# EAGLE board OpenBook_Board (EAGLE 9.7.0)
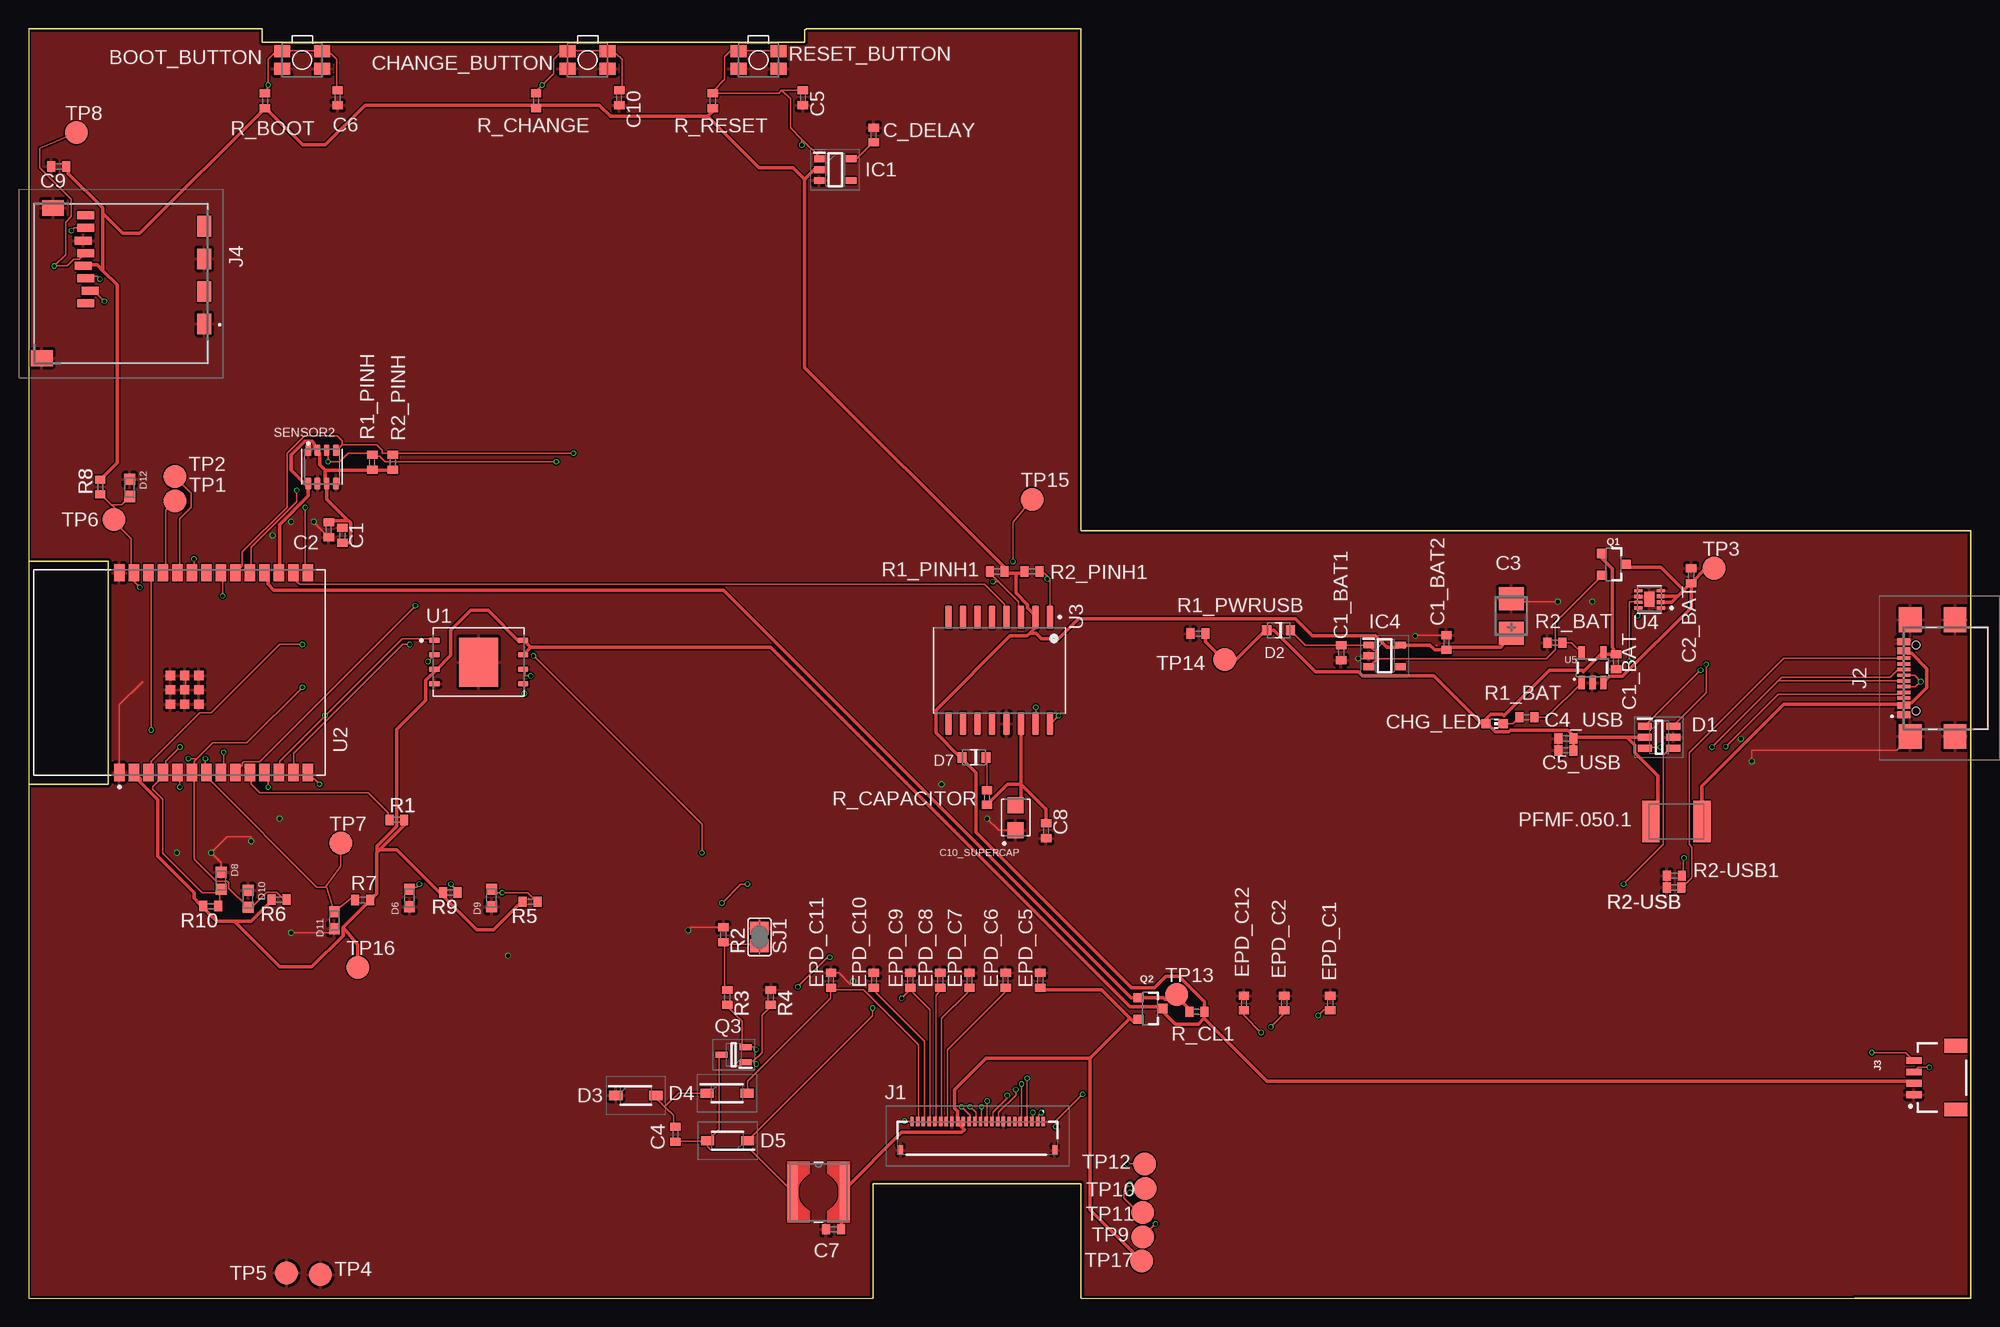
[diagram p0: board, top side]
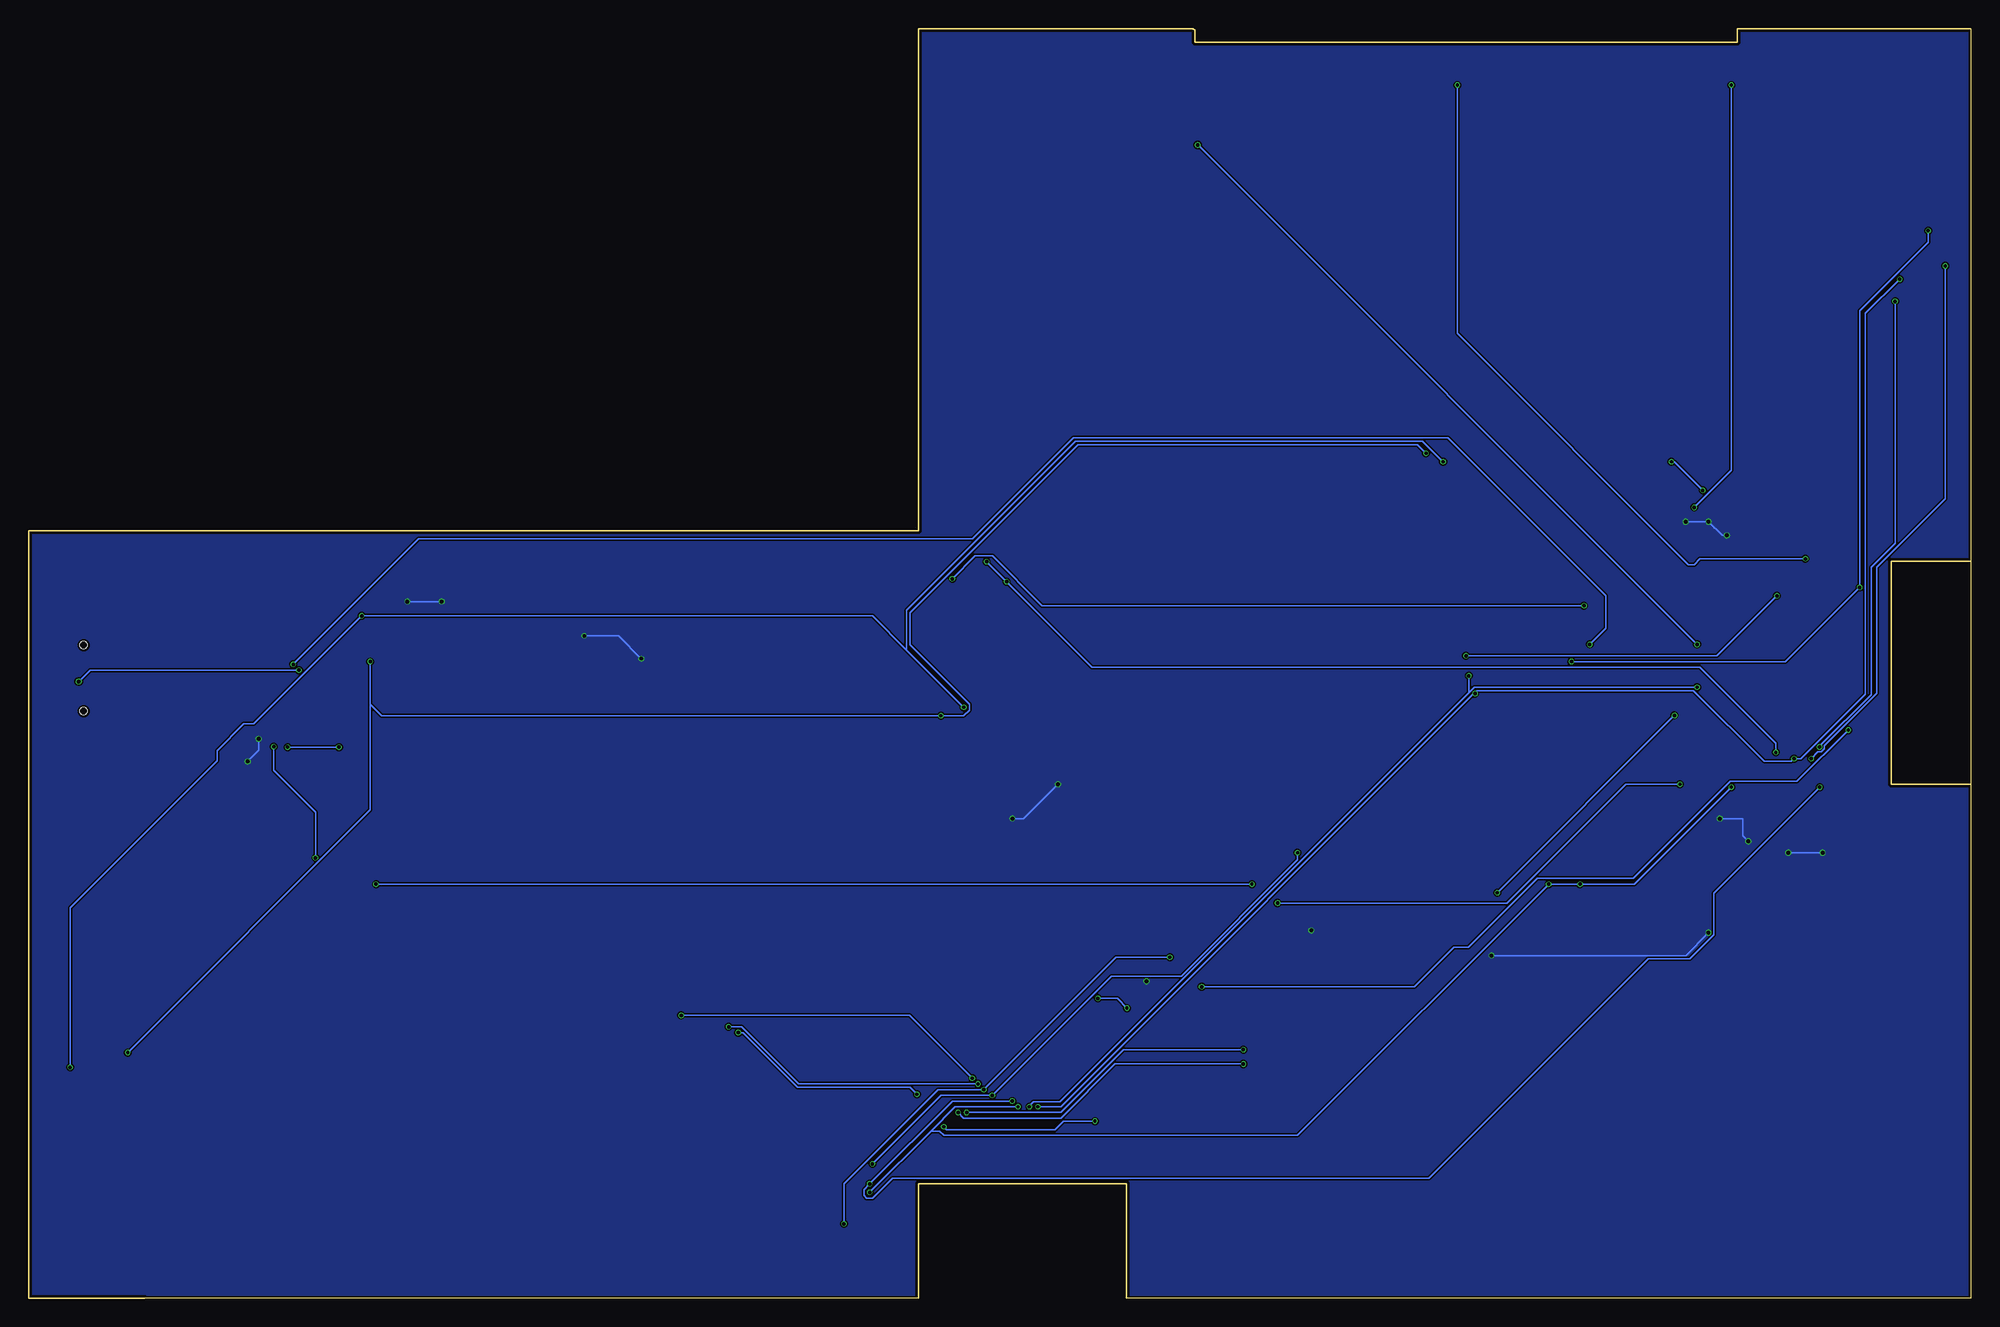
[diagram p1: board, bottom side, seen from below]

Size 170.19 x 111.2 mm. Coordinates in mm from the lower left corner, seen from the top.
Outline: 0,64.54 0,111.2 20.48,111.2 20.48,110 68,110 68,111.03 68.17,111.2 92.2,111.2 92.2,67.2 170.19,67.2 170.19,0 160,0 92.2,0 92.2,10 74,10 74,0 0,0 0,45
Outline: 0,64.54 0,45
Outline: 0,64.54 7,64.54 7,45 0,45
Copper layers (1*16): Top 0.035mm / dielectric 1.6mm / Bottom 0.035mm
Design rules "jlcpcb-2layers.dru": minimum track width 0.15mm, minimum drill 0.3mm, track to track 5mil, track to pad 5mil, pad to pad 5mil, via to via 5mil, smd to smd 5mil, copper to edge 0.2mm, drill to drill 6mil, minimum pad ring 10mil, minimum via ring 3mil, stop-mask expansion 4mil, vias tented up to drill 0mil, thermal gap 10mil
Net classes: 1 pwr: width 0.3 mm

## Footprints (pad centres in the part's own frame; a part is rotated, then mirrored left to right if it is on the bottom)
MYBUTTON = smd 1.4 x 1.05: 1 1.75,0.75; 2 -1.75,0.75; 3 -1.75,-0.75; 4 1.75,-0.75
EAGLE-LTSPICE_C0402 = smd 0.7 x 0.9: 1 -0.65,0; 2 0.65,0
RCL_CT3528 = smd 2 x 2.2: + -1.5,0; - 1.5,0
CAPCP3225X100N = smd 1.4 x 1.4: 1 -1.1,0; 2 1.1,0
ADAFRUIT_CHIP-LED0603 = smd 0.8 x 0.8: A 0,-0.75; C 0,0.75
SOT95P280X145-6N = smd 1.2 x 0.6: 1 -1.25,0.95; 2 -1.25,0; 3 -1.25,-0.95; 4 1.25,-0.95; 5 1.25,0; 6 1.25,0.95
ESP32_WROVER_AVX---SD0805S020S1R0_AVX_SD0805S020S1R0_0 = smd 0.8 x 0.9: 1 -1.05,0; 2 1.05,0
SOD3716X135N = smd 1.15 x 0.8: 1 -1.75,0; 2 1.75,0
DIOC1608X36N = smd 0.97 x 0.94: 1 -0.75,0; 2 0.75,0
SOT95P280X125-5N = smd 0.9 x 0.6: 1 -1.4,0.95; 2 -1.4,0; 3 -1.4,-0.95; 4 1.4,-0.95; 5 1.4,0.95
SOT95P280X120-5N = smd 0.9 x 0.6: 1 -1.4,0.95; 2 -1.4,0; 3 -1.4,-0.95; 4 1.4,-0.95; 5 1.4,0.95
FH34SRJ24S05SH99 = smd 0.3 x 0.8: 1 5.75,1.45; 2 5.25,1.45; 3 4.75,1.45; 4 4.25,1.45; 5 3.75,1.45; 6 3.25,1.45; 7 2.75,1.45; 8 2.25,1.45; 9 1.75,1.45; 10 1.25,1.45; 11 0.75,1.45; 12 0.25,1.45; 13 -0.25,1.45; 14 -0.75,1.45; 15 -1.25,1.45; 16 -1.75,1.45; 17 -2.25,1.45; 18 -2.75,1.45; 19 -3.25,1.45; 20 -3.75,1.45; 21 -4.25,1.45; 22 -4.75,1.45; 23 -5.25,1.45; 24 -5.75,1.45 | smd 0.4 x 0.8: MP1 6.75,-1.05; MP2 -6.75,-1.05
SAMACSYS_PARTS_USB4110GFA = smd 0.3 x 1.15: A1 -3.35,3.678; A4 -2.55,3.678; A5 -1.25,3.678; A6 -0.25,3.678; A7 0.25,3.678; A8 1.25,3.678; A9 2.55,3.678; A12 3.35,3.678; B1 3.05,3.678; B4 2.25,3.678; B5 1.75,3.678; B6 0.75,3.678; B7 -0.75,3.678; B8 -1.75,3.678; B9 -2.25,3.678; B12 -3.05,3.678 | smd 2.18 x 2: MP1 -5.11,-0.827; MP2 5.11,-0.827; MP3 -5.11,3.103; MP4 5.11,3.103 | hole 0.65: -2.89,2.603; 2.89,2.603
JST04_1MM_RA = smd 0.6 x 1.35: 1 -1.5,0; 2 -0.5,0; 3 0.5,0; 4 1.5,0 | smd 1.2 x 2: NC1 2.8,-3.675; NC2 -2.8,-3.675
112ATAARR03ATTEND = smd 1.8 x 1.2: G1 10.6,10.4; G2 4.9,10.4; S1 7.75,10.4; S2 2.05,10.4 | smd 1.4 x 1.9: G3 13.6,-3.85; G4 0.45,-2.85 | smd 0.7 x 1.5: P1 8.8,0; P2 7.7,0.4; P3 6.6,0; P4 5.5,-0.2; P5 4.4,0; P6 3.3,-0.2; P7 2.2,0; P8 1.1,0
IND_4828-WE-TPC_WRE = smd 0.889 x 4.826: 1 -2.286,0; 2 2.286,0
ESP32C6_VARISTOR_CT/CN1812 = smd 1.5 x 3.6: 1 -2.25,0; 2 2.25,0
ESP32_WROVER_SPARKFUN-DISCRETESEMI_SOT23-3 = smd 0.8 x 0.9: 1 -0.95,-1; 2 0.95,-1; 3 0,1.1
SOT65P210X110-3N = smd 1.05 x 0.5: 1 -1.05,0.65; 2 -1.05,-0.65; 3 1.05,0
ESP32_WROVER_EAGLE-LTSPICE_R0402 = smd 0.7 x 0.9: 1 -0.65,0; 2 0.65,0
ESP32_WROVER_BME680_PSON80P300X300X100-8N = smd 1.016 x 0.5: 1 1.458,1.2; 2 1.458,0.4; 3 1.458,-0.4; 4 1.458,-1.2; 5 -1.458,-1.22; 6 -1.458,-0.4; 7 -1.458,0.4; 8 -1.458,1.2
SJ = smd 1.168 x 1.6: 1 -0.762,0; 2 0.762,0
TP20R = smd 2 x 2: TP 0,0
SON127P600X800X80-9N = smd 0.94 x 0.44: 1 -3.895,1.905; 2 -3.895,0.635; 3 -3.895,-0.635; 4 -3.895,-1.905; 5 3.895,-1.905; 6 3.895,-0.635; 7 3.895,0.635; 8 3.895,1.905 | smd 3.4 x 4.3: 9 0,0
XCVR_ESP32-C6-WROOM-1-N8 = smd 1.5 x 0.9: 1 -8.75,5.26; 2 -8.75,3.99; 3 -8.75,2.72; 4 -8.75,1.45; 5 -8.75,0.18; 6 -8.75,-1.09; 7 -8.75,-2.36; 8 -8.75,-3.63; 9 -8.75,-4.9; 10 -8.75,-6.17; 11 -8.75,-7.44; 12 -8.75,-8.71; 13 -8.75,-9.98; 14 -8.75,-11.25; 15 8.75,-11.25; 16 8.75,-9.98; 17 8.75,-8.71; 18 8.75,-7.44; 19 8.75,-6.17; 20 8.75,-4.9; 21 8.75,-3.63; 22 8.75,-2.36; 23 8.75,-1.09; 24 8.75,0.18; 25 8.75,1.45; 26 8.75,2.72; 27 8.75,3.99; 28 8.75,5.26 | smd 0.8 x 0.8: 29_1 -2.755,0.79; 29_2 -1.505,0.79; 29_3 -0.255,0.79; 29_4 -2.755,-0.46; 29_5 -1.505,-0.46; 29_6 -0.255,-0.46; 29_7 -2.755,-1.71; 29_8 -1.505,-1.71; 29_9 -0.255,-1.71
SOIC127P1032X265-16N = smd 2.05 x 0.59: 1 -4.655,4.445; 2 -4.655,3.175; 3 -4.655,1.905; 4 -4.655,0.635; 5 -4.655,-0.635; 6 -4.655,-1.905; 7 -4.655,-3.175; 8 -4.655,-4.445; 9 4.655,-4.445; 10 4.655,-3.175; 11 4.655,-1.905; 12 4.655,-0.635; 13 4.655,0.635; 14 4.655,1.905; 15 4.655,3.175; 16 4.655,4.445
SON50P200X200X80-9N = smd 0.76 x 0.27: 1 -0.985,0.75; 4 -0.985,-0.75; 5 0.985,-0.75; 6 0.985,-0.25; 7 0.985,0.25; 8 0.985,0.75 | smd 0.76 x 0.35: 2 -0.985,0.25; 3 -0.985,-0.25 | smd 0.9 x 1.3: 9 0,0
ESP32_WROVER_SPARKFUN-IC-POWER_SOT23-5 = smd 0.55 x 1.2: 1 -0.95,-1.3; 2 0,-1.3; 3 0.95,-1.3; 4 0.95,1.3; 5 -0.95,1.3

## Placement (x,y rotation side)
BOOT_BUTTON  BUTTON_CUSYOMV1MYBUTTON  [MYBUTTON]  23.99,108.45 180 top
C1  100nF  [EAGLE-LTSPICE_C0402]  27.5,66.8 90 top
C1_BAT  4.7uF  [EAGLE-LTSPICE_C0402]  139.09,55.72 270 top
C1_BAT1  4.7uF  [EAGLE-LTSPICE_C0402]  115.01,56.53 270 top
C1_BAT2  4.7uF  [EAGLE-LTSPICE_C0402]  124.23,57.42 90 top
C2  100nF  [EAGLE-LTSPICE_C0402]  26.31,67.29 270 top
C2_BAT  4.7uF  [EAGLE-LTSPICE_C0402]  145.67,63.28 90 top
C3  100uF  [RCL_CT3528]  129.91,59.74 90 top
C4  4.7uF/25V  [EAGLE-LTSPICE_C0402]  56.68,14.33 270 top
C4_USB  100nF  [EAGLE-LTSPICE_C0402]  134.7,49.01 180 top
C5  1uF  [EAGLE-LTSPICE_C0402]  67.85,105.13 270 top
C5_USB  4.7uF  [EAGLE-LTSPICE_C0402]  134.69,47.97 180 top
C6  100nF  [EAGLE-LTSPICE_C0402]  27.09,105.13 270 top
C7  10uF  [EAGLE-LTSPICE_C0402]  70.53,6.03 180 top
C8  100nF  [EAGLE-LTSPICE_C0402]  89.16,40.92 270 top
C9  100nF  [EAGLE-LTSPICE_C0402]  2.65,99.12 180 top
C10  100nF  [EAGLE-LTSPICE_C0402]  51.76,105.13 270 top
C10_SUPERCAP  CPH3225A  [CAPCP3225X100N]  86.49,42.08 90 top
C_DELAY  100nF  [EAGLE-LTSPICE_C0402]  74.05,101.87 90 top
CHANGE_BUTTON  BUTTON_CUSYOMV1MYBUTTON  [MYBUTTON]  48.99,108.45 180 top
CHG_LED  [ADAFRUIT_CHIP-LED0603]  128.45,50.3 270 top
D1  USBLC6-2SC6Y  [SOT95P280X145-6N]  142.86,49.12 0 top
D2  ESP32_WROVER_AVX---SD0805S020S1R0_AVX_SD0805S020S1R0_0_0AVX_SD0805S020S1R0_0_0  [ESP32_WROVER_AVX---SD0805S020S1R0_AVX_SD0805S020S1R0_0]  109.53,58.5 180 top
D3  MBR0530SOD3716X135  [SOD3716X135N]  53.21,17.74 0 top
D4  MBR0530SOD3716X135  [SOD3716X135N]  61.21,17.93 0 top
D5  MBR0530SOD3716X135  [SOD3716X135N]  61.24,13.78 180 top
D6  PGB1010603MRDIOC  [DIOC1608X36N]  33.38,35.04 90 top
D7  ESP32_WROVER_AVX---SD0805S020S1R0_AVX_SD0805S020S1R0_0_0AVX_SD0805S020S1R0_0_0  [ESP32_WROVER_AVX---SD0805S020S1R0_AVX_SD0805S020S1R0_0]  82.84,47.36 180 top
D8  PGB1010603MRDIOC  [DIOC1608X36N]  16.87,36.56 270 top
D9  PGB1010603MRDIOC  [DIOC1608X36N]  40.57,35.04 90 top
D10  PGB1010603MRDIOC  [DIOC1608X36N]  19.24,34.96 270 top
D11  PGB1010603MRDIOC  [DIOC1608X36N]  26.8,33.09 90 top
D12  PGB1010603MRDIOC  [DIOC1608X36N]  8.86,70.96 270 top
EPD_C1  1uF/50V  [EAGLE-LTSPICE_C0402]  114.05,25.84 90 top
EPD_C2  1uF/50V  [EAGLE-LTSPICE_C0402]  110.02,25.84 90 top
EPD_C5  0.1uF/50V  [EAGLE-LTSPICE_C0402]  88.64,27.84 90 top
EPD_C6  1uF/50V  [EAGLE-LTSPICE_C0402]  85.61,27.84 90 top
EPD_C7  1uF/50V  [EAGLE-LTSPICE_C0402]  82.45,27.84 90 top
EPD_C8  1uF/50V  [EAGLE-LTSPICE_C0402]  79.88,27.84 90 top
EPD_C9  1uF/50V  [EAGLE-LTSPICE_C0402]  77.26,27.84 90 top
EPD_C10  1uF/50V  [EAGLE-LTSPICE_C0402]  74.07,27.84 90 top
EPD_C11  1uF/50V  [EAGLE-LTSPICE_C0402]  70.31,27.84 90 top
EPD_C12  1uF/50V  [EAGLE-LTSPICE_C0402]  106.5,25.84 90 top
IC1  BD5229G-TR  [SOT95P280X125-5N]  70.68,98.84 0 top
IC4  XC6220A331MR-G  [SOT95P280X120-5N]  118.82,56.25 0 top
J1  FH34SRJ-24S-0.5SH_99_  [FH34SRJ24S05SH99]  83.16,14.01 0 top
J2  SAMACSYS_PARTS_USB4110-GF-A  [SAMACSYS_PARTS_USB4110GFA]  167.97,54.3 90 top
J3  QWIIC_RIGHT_ANGLE  [JST04_1MM_RA]  165.19,19.3 90 top
J4  112A-TAAR-R03_ATTEND  [112ATAARR03ATTEND]  5,95.93 270 top
L1  68uH  [IND_4828-WE-TPC_WRE]  69.22,9.27 0 top
PFMF.050.1  ESP32C6_VARISTORCN1812  [ESP32C6_VARISTOR_CT/CN1812]  144.38,41.74 180 top
Q1  20V/4.2A/52mΩ/1.4W  [ESP32_WROVER_SPARKFUN-DISCRETESEMI_SOT23-3]  138.85,64.26 270 top
Q2  20V/4.2A/52mΩ/1.4W  [ESP32_WROVER_SPARKFUN-DISCRETESEMI_SOT23-3]  98.26,25.36 270 top
Q3  SI1308EDL-T1-GE3  [SOT65P210X110-3N]  61.79,21.31 180 top
R1  10K  [ESP32_WROVER_EAGLE-LTSPICE_R0402]  32.27,41.88 0 top
R1_BAT  200  [ESP32_WROVER_EAGLE-LTSPICE_R0402]  131.27,50.86 180 top
R1_PINH  10K  [ESP32_WROVER_EAGLE-LTSPICE_R0402]  30.12,73.2 270 top
R1_PINH1  10K  [ESP32_WROVER_EAGLE-LTSPICE_R0402]  84.88,63.64 0 top
R1_PWRUSB  100K  [ESP32_WROVER_EAGLE-LTSPICE_R0402]  102.47,58.2 0 top
R2  2.2  [ESP32_WROVER_EAGLE-LTSPICE_R0402]  60.88,31.81 270 top
R2-USB  5k1  [ESP32_WROVER_EAGLE-LTSPICE_R0402]  144.18,35.96 180 top
R2-USB1  5k1  [ESP32_WROVER_EAGLE-LTSPICE_R0402]  144.19,36.99 0 top
R2_BAT  2K  [ESP32_WROVER_EAGLE-LTSPICE_R0402]  133.73,57.4 0 top
R2_PINH  10K  [ESP32_WROVER_EAGLE-LTSPICE_R0402]  31.93,73.2 270 top
R2_PINH1  10K  [ESP32_WROVER_EAGLE-LTSPICE_R0402]  87.92,63.65 180 top
R3  0.47  [ESP32_WROVER_EAGLE-LTSPICE_R0402]  61.23,26.33 270 top
R4  10K  [ESP32_WROVER_EAGLE-LTSPICE_R0402]  65.04,26.33 270 top
R5  10K  [ESP32_WROVER_EAGLE-LTSPICE_R0402]  43.96,34.71 180 top
R6  10K  [ESP32_WROVER_EAGLE-LTSPICE_R0402]  21.96,34.9 180 top
R7  10K  [ESP32_WROVER_EAGLE-LTSPICE_R0402]  29.29,34.86 0 top
R8  10K  [ESP32_WROVER_EAGLE-LTSPICE_R0402]  6.28,71.04 90 top
R9  10K  [ESP32_WROVER_EAGLE-LTSPICE_R0402]  36.96,35.52 180 top
R10  10K  [ESP32_WROVER_EAGLE-LTSPICE_R0402]  15.96,34.33 180 top
R_BOOT  10K  [ESP32_WROVER_EAGLE-LTSPICE_R0402]  20.72,104.87 90 top
R_CAPACITOR  15  [ESP32_WROVER_EAGLE-LTSPICE_R0402]  83.97,43.84 270 top
R_CHANGE  10K  [ESP32_WROVER_EAGLE-LTSPICE_R0402]  44.48,104.87 90 top
R_CL1  10K  [ESP32_WROVER_EAGLE-LTSPICE_R0402]  102.37,25.07 0 top
R_RESET  10K  [ESP32_WROVER_EAGLE-LTSPICE_R0402]  59.96,104.87 90 top
RESET_BUTTON  BUTTON_CUSYOMV1MYBUTTON  [MYBUTTON]  63.96,108.45 180 top
SENSOR2  BME688  [ESP32_WROVER_BME680_PSON80P300X300X100-8N]  25.72,72.8 90 top
SJ1  [SJ]  64.04,31.62 270 top
TP1  TPTP20R  [TP20R]  12.84,69.83 0 top
TP2  TPTP20R  [TP20R]  12.81,71.96 0 top
TP3  TPTP20R  [TP20R]  147.67,63.92 0 top
TP4  TPTP20R  [TP20R]  25.59,2.04 0 top
TP5  TPTP20R  [TP20R]  22.61,2.19 0 top
TP6  TPTP20R  [TP20R]  7.48,68.19 0 top
TP7  TPTP20R  [TP20R]  27.35,39.84 0 top
TP8  TPTP20R  [TP20R]  4.2,102.09 0 top
TP9  TPTP20R  [TP20R]  97.64,5.36 0 top
TP10  TPTP20R  [TP20R]  97.84,9.61 0 top
TP11  TPTP20R  [TP20R]  97.62,7.48 0 top
TP12  TPTP20R  [TP20R]  97.79,11.74 0 top
TP13  TPTP20R  [TP20R]  100.58,26.58 0 top
TP14  TPTP20R  [TP20R]  104.8,55.92 0 top
TP15  TPTP20R  [TP20R]  87.92,69.96 0 top
TP16  TPTP20R  [TP20R]  28.84,28.96 0 top
TP17  TPTP20R  [TP20R]  97.52,3.23 0 top
U1  W25Q512JVEIQ  [SON127P600X800X80-9N]  39.44,55.7 0 top
U2  ESP32-C6-WROOM-1-N8  [XCVR_ESP32-C6-WROOM-1-N8]  13.22,54.78 90 top
U3  DS3231SN#  [SOIC127P1032X265-16N]  85.06,54.97 270 top
U4  MAX17048G+T10  [SON50P200X200X80-9N]  142.02,61.2 180 top
U5  MCP73831  [ESP32_WROVER_SPARKFUN-IC-POWER_SOT23-5]  137.03,55.21 0 top

## Library data of the parts
BOOT_BUTTON C1 C1_BAT C1_BAT1 C1_BAT2 C2 C2_BAT C4 C4_USB C5 C5_USB C6-C10 C_DELAY CHANGE_BUTTON CHG_LED D2-D12 EPD_C1 EPD_C2 EPD_C5-EPD_C12 PFMF.050.1 Q1 Q2 R1 R1_BAT R1_PINH R1_PINH1 R1_PWRUSB R2 R2-USB R2-USB1 R2_BAT R2_PINH R2_PINH1 R3-R10 R_BOOT R_CAPACITOR R_CHANGE R_CL1 R_RESET RESET_BUTTON SJ1 TP1-TP17 = DeskAssistant v19 v1
C3 = DeskAssistant v19 v1; SPICEPREFIX: C
C10_SUPERCAP = DeskAssistant v19 v1; AVAILABILITY: Not in stock; CHECK_PRICES: https://www.snapeda.com/parts/CPH3225A/Seiko+Instruments/view-part/?ref=eda; DESCRIPTION: 11 mF (EDLC) Supercapacitor 3.3 V 1210 (3225 Metric) - -; MF: Seiko Instruments; MP: CPH3225A; PACKAGE: 1210 Seiko; PRICE: None; PURCHASE-URL: https://www.snapeda.com/api/url_track_click_mouser/?unipart_id=562593&manufacturer=Seiko Instruments&part_name=CPH3225A&search_term=None; SNAPEDA_LINK: https://www.snapeda.com/parts/CPH3225A/Seiko+Instruments/view-part/?ref=snap
D1 = DeskAssistant v19 v1; AVAILABILITY: In Stock; CHECK_PRICES: https://www.snapeda.com/parts/USBLC6-2SC6Y/STMicroelectronics/view-part/?ref=eda; DESCRIPTION: 17V Clamp 5A (8/20µs) Ipp Tvs Diode Surface Mount SOT-23-6; MF: STMicroelectronics; MP: USBLC6-2SC6Y; PACKAGE: SOT-23-6 STMicroelectronics; PRICE: None; SNAPEDA_LINK: https://www.snapeda.com/parts/USBLC6-2SC6Y/STMicroelectronics/view-part/?ref=snap
IC1 = DeskAssistant v19 v1; DESCRIPTION: Voltage Detector with Adjustable Delay Time: CMOS processes are utilized to develop high precision, low current consumption CMOS reset ICs that allow arbitrary setting of the delay time. The extensive lineup includes both Nch Open Drain and CMOS output types in a wide range of detection voltages (from 2.3V to 6.0V, in 0.1V steps), enabling selection of the ideal solution based on customer requirements. In addition, the entire series is of course both lead-free and RoHS-compliant.; HEIGHT: 1.25mm; MANUFACTURER_NAME: ROHM Semiconductor; MANUFACTURER_PART_NUMBER: BD5229G-TR; MOUSER_PART_NUMBER: 755-BD5229G-TR; MOUSER_PRICE-STOCK: https://www.mouser.co.uk/ProductDetail/ROHM-Semiconductor/BD5229G-TR?qs=4kLU8WoGk0vvnhrrYwdszw%3D%3D
IC4 = DeskAssistant v19 v1; DESCRIPTION: LDO Voltage Regulators; HEIGHT: 1.2mm; MANUFACTURER_NAME: Torex; MANUFACTURER_PART_NUMBER: XC6220A331MR-G; MOUSER_PART_NUMBER: 865-XC6220A331MR-G; MOUSER_PRICE-STOCK: https://www.mouser.co.uk/ProductDetail/Torex-Semiconductor/XC6220A331MR-G?qs=AsjdqWjXhJ8ZSWznL1J0gg%3D%3D
J1 = DeskAssistant v19 v1; DESCRIPTION: 24 Position FFC, FPC Connector Contacts, Top and Bottom 0.020" (0.50mm) Surface Mount, Right Angle; HEIGHT: 1.1mm; MANUFACTURER_NAME: Hirose; MANUFACTURER_PART_NUMBER: FH34SRJ-24S-0.5SH(99); MOUSER_PART_NUMBER: 798-FH34SRJ24S05SH99; MOUSER_PRICE-STOCK: https://www.mouser.co.uk/ProductDetail/Hirose-Connector/FH34SRJ-24S-0.5SH99?qs=vcbW%252B4%252BSTIpKBl5ap9J8Fw%3D%3D
J2 = DeskAssistant v19 v1; DESCRIPTION: CONN USB 2.0 TYPE-C R/A SMT; HEIGHT: 3.26mm; MANUFACTURER_NAME: GCT (GLOBAL CONNECTOR TECHNOLOGY); MANUFACTURER_PART_NUMBER: USB4110-GF-A; MOUSER_PART_NUMBER: 640-USB4110-GF-A; MOUSER_PRICE-STOCK: https://www.mouser.co.uk/ProductDetail/GCT/USB4110-GF-A?qs=KUoIvG%2F9IlYiZvIXQjyJeA%3D%3D
J3 = DeskAssistant v19 v1; PROD_ID: CONN-13694
J4 = DeskAssistant v19 v1; DESCRIPTION: Micro SD Card Socket, Push-Push Type, Top Mount, SMT, H=1.83mm, 10u; HEIGHT: 1.9mm; MANUFACTURER_NAME: ATTEND; MANUFACTURER_PART_NUMBER: 112A-TAAR-R03 ATTEND
L1 = DeskAssistant v19 v1; COPYRIGHT: Copyright (C) 2024 Ultra Librarian. All rights reserved.; MANUFACTURER_PART_NUMBER: 744043680; MFR_NAME: Wurth Electronics
Q3 = DeskAssistant v19 v1; AVAILABILITY: In Stock; CHECK_PRICES: https://www.snapeda.com/parts/SI1308EDL-T1-GE3/Vishay+Siliconix/view-part/?ref=eda; DESCRIPTION: Si1308EDL-T1-GE3 N-channel MOSFET Transistor, 1.5 A, 30 V, 3-Pin SC-70 | Siliconix / Vishay SI1308EDL-T1-GE3; MF: Vishay Siliconix; MP: SI1308EDL-T1-GE3; PACKAGE: SOT-323 Vishay Semiconductor; PRICE: None; PURCHASE-URL: https://www.snapeda.com/api/url_track_click_mouser/?unipart_id=274603&manufacturer=Vishay Siliconix&part_name=SI1308EDL-T1-GE3&search_term=None; SNAPEDA_LINK: https://www.snapeda.com/parts/SI1308EDL-T1-GE3/Vishay+Siliconix/view-part/?ref=snap
SENSOR2 = DeskAssistant v19 v1; AVAILABILITY: Unavailable; DESCRIPTION: Integrated Environmental Unit; MF: Bosch Sensortec; MP: BME680; PACKAGE: LGA-8 Bosch Tools; PRICE: None
U1 = DeskAssistant v19 v1; AVAILABILITY: In Stock; CHECK_PRICES: https://www.snapeda.com/parts/W25Q512JVEIQ/Winbond+Electronics/view-part/?ref=eda; DESCRIPTION: FLASH - NOR Memory IC 512Mb (64M x 8) SPI - Quad I/O 133 MHz 8-WSON (8x6); MF: Winbond Electronics; MP: W25Q512JVEIQ; PACKAGE: Package; PRICE: None; SNAPEDA_LINK: https://www.snapeda.com/parts/W25Q512JVEIQ/Winbond+Electronics/view-part/?ref=snap
U2 = DeskAssistant v19 v1; AVAILABILITY: In Stock; CHECK_PRICES: https://www.snapeda.com/parts/ESP32-C6-WROOM-1-N8/Espressif+Systems/view-part/?ref=eda; DESCRIPTION: Multiprotocol Modules ESP32-C6 module, Wi-Fi 6 in 2.4 GHz band, Bluetooth 5, Zigbee 3.0 and Thread. ESP34-WROOM Compatible - ENGINEERING SAMPLE; MF: Espressif Systems; MP: ESP32-C6-WROOM-1-N8; PACKAGE: None; PRICE: None; SNAPEDA_LINK: https://www.snapeda.com/parts/ESP32-C6-WROOM-1-N8/Espressif+Systems/view-part/?ref=snap
U3 = DeskAssistant v19 v1; AVAILABILITY: In Stock; CHECK_PRICES: https://www.snapeda.com/parts/DS3231SN%23/Analog+Devices/view-part/?ref=eda; DESCRIPTION: Extremely Accurate I²C-Integrated RTC/TCXO/Crystal; MF: Analog Devices; MP: DS3231SN#; PACKAGE: SOIC-16 Maxim; PRICE: None; PURCHASE-URL: https://www.snapeda.com/api/url_track_click_mouser/?unipart_id=99048&manufacturer=Analog Devices&part_name=DS3231SN#&search_term=None; SNAPEDA_LINK: https://www.snapeda.com/parts/DS3231SN%23/Analog+Devices/view-part/?ref=snap
U4 = DeskAssistant v19 v1; AVAILABILITY: In Stock; CHECK_PRICES: https://www.snapeda.com/parts/MAX17048G+T10/Analog+Devices/view-part/?ref=eda; DESCRIPTION: 3µA 1-Cell/2-Cell Fuel Gauge with ModelGauge; MF: Analog Devices; MP: MAX17048G+T10; PACKAGE: TDFN-8 Maxim; PRICE: None; PURCHASE-URL: https://www.snapeda.com/api/url_track_click_mouser/?unipart_id=329239&manufacturer=Analog Devices&part_name=MAX17048G+T10&search_term=None; SNAPEDA_LINK: https://www.snapeda.com/parts/MAX17048G+T10/Analog+Devices/view-part/?ref=snap
U5 = DeskAssistant v19 v1; PROD_ID: IC-09995

## Nets
3V3 [pwr]: C1_BAT2.1 C3.+ C9.1 D7.2 IC1.2 IC4.5 J3.2 J4.P4 Q2.3 R1.2 R1_PINH1.2 R2_PINH1.2 R5.2 R6.2 R7.2 R8.2 R9.2 R10.2 R_BOOT.1 R_CHANGE.1 R_CL1.2 R_RESET.1 TP16.TP U1.3 U1.7 U1.8 U2.2 U3.2
32KHZ: R2_PINH1.1 U2.9 U3.1
DN: D1.1 J2.A7 J2.B7
DP: D1.3 J2.A6 J2.B6
EPD_3V3 [pwr]: C7.1 EPD_C5.1 J1.15 J1.16 L1.2 Q2.2 TP17.TP
EPD_3V3_C [pwr]: Q2.1 R_CL1.1 TP13.TP U2.18
EPD_BUSY: J1.9 TP9.TP U2.26
EPD_CS: D6.2 J1.12 R9.1 TP10.TP U2.11
EPD_DC: J1.11 TP11.TP U2.5
EPD_RST: J1.10 TP12.TP U2.21
FLASH_CS: D9.2 R5.1 U1.1 U2.12
GDR: J1.2 Q3.1 R4.2
GND: BOOT_BUTTON.1 BOOT_BUTTON.2 C1.2 C1_BAT1.2 C1_BAT2.2 C1_BAT.2 C2.2 C2_BAT.2 C3.- C4_USB.2 C5.2 C5_USB.2 C6.2 C7.2 C8.2 C9.2 C10.2 C10_SUPERCAP.1 C_DELAY.2 CHANGE_BUTTON.1 CHANGE_BUTTON.2 D1.5 D3.1 D6.1 D8.1 D9.1 D10.1 D11.1 D12.1 EPD_C1.2 EPD_C2.2 EPD_C5.2 EPD_C6.2 EPD_C7.2 EPD_C8.2 EPD_C9.2 EPD_C10.2 EPD_C11.2 EPD_C12.2 IC1.3 IC4.2 J1.8 J1.17 J1.MP1 J1.MP2 J2.A1 J2.A12 J2.B1 J2.B12 J2.MP1 J2.MP2 J2.MP3 J2.MP4 J3.1 J4.G1 J4.G2 J4.G3 J4.G4 J4.P6 R1_PWRUSB.1 R2-USB1.1 R2-USB.2 R2.1 R2_BAT.1 R4.1 RESET_BUTTON.1 RESET_BUTTON.2 SENSOR2.1 SENSOR2.5 SENSOR2.7 SJ1.1 TP4.TP TP5.TP U1.4 U1.9 U2.1 U2.28 U2.29_1 U2.29_2 U2.29_3 U2.29_4 U2.29_5 U2.29_6 U2.29_7 U2.29_8 U2.29_9 U3.13 U4.1 U4.4 U4.6 U4.9 U5.2
GPIO8: R1.1 U2.10
I2C_PW [pwr]: C1.1 C2.1 R1_PINH.2 R2_PINH.2 SENSOR2.2 SENSOR2.6 SENSOR2.8 U2.17
INT_RTC: R1_PINH1.1 TP15.TP U2.8 U3.3
IO/BOOT: BOOT_BUTTON.3 BOOT_BUTTON.4 C6.1 R_BOOT.2 U2.15
IO/CHANGE: C10.1 CHANGE_BUTTON.3 CHANGE_BUTTON.4 R_CHANGE.2 U2.23
MISO: D12.2 J4.P7 R8.1 TP6.TP U1.2 U2.27
MOSI: D11.2 J1.14 J4.P3 R7.1 TP7.TP U1.5 U2.7
N$2: J2.A5 R2-USB1.2
N$5: D7.1 R_CAPACITOR.1
N$10: J2.B5 R2-USB.1
N$20: C1_BAT1.1 D2.1 IC4.1 IC4.3 Q1.2
N$41: C4.1 D3.2 D4.1
N$43: R1_BAT.1 U5.1
N$44: CHG_LED.C R1_BAT.2
N$45: R2_BAT.2 U5.5
N$48: EPD_C12.1 J1.24
N$50: EPD_C10.1 J1.22
N$52: EPD_C8.1 J1.20
N$53: EPD_C7.1 J1.19
N$54: EPD_C6.1 J1.18
N$65: EPD_C2.1 J1.5
N$66: EPD_C1.1 J1.4
N$77: C_DELAY.1 IC1.5
PREVGH: D5.1 EPD_C9.1 J1.21
PREVGL: D4.2 EPD_C11.1 J1.23
RESE: J1.3 Q3.2 R3.2
RESE': R2.2 R3.1 SJ1.2
RESET: C5.1 IC1.1 R_RESET.2 RESET_BUTTON.3 RESET_BUTTON.4 U2.3
RTC_RST: U2.16 U3.4
RX: TP2.TP U2.24
SCK: D10.2 J1.13 J4.P5 R6.1 TP8.TP U1.6 U2.6
SCL: J3.4 R2_PINH.1 SENSOR2.4 U2.20 U3.16 U4.7
SDA: J3.3 R1_PINH.1 SENSOR2.3 U2.19 U3.15 U4.8
SRC: C4.2 D5.2 L1.1 Q3.3
SS_SD: D8.2 J4.P2 R10.1 U2.4
TX: TP1.TP U2.25
USB_D+: D1.4 U2.14
USB_D-: D1.6 U2.13
VBAT [pwr]: C2_BAT.1 Q1.3 TP3.TP U4.2 U4.3 U5.3
VBUS [pwr]: C1_BAT.1 C4_USB.1 C5_USB.1 CHG_LED.A D1.2 D2.2 PFMF.050.1.2 Q1.1 R1_PWRUSB.2 TP14.TP U5.4
VRTC [pwr]: C8.1 C10_SUPERCAP.2 R_CAPACITOR.2 U3.14
VUSB [pwr]: J2.A4 J2.A9 J2.B4 J2.B9 PFMF.050.1.1

## Tracks (layer width: path | path; a pad name or v marks a point on that pad's centre or on a via)
3V3
  Top 0.3: 44.5,104.5 50,104.5 51,103.5 59.5,103.5 | 59.5,103.5 60,104 R_RESET.1 | 59.5,103.5 64,99 67,99 68,98 | IC1.2 69,99 68,98 | 6.5,90 6,90.5 5,90.5 J4.P4 | 6.5,90 7.75,88.75 7.75,73.16 R8.2 | 6.5,90 6.5,95 | 6.5,95 6.5,95.5 3.5,98.5 3.5,99 C9.1 | 6.5,95 8.25,93.25 9.75,93.25 R_BOOT.1 21,104 24,101 26,101 29.5,104.5 44.5,104.5 | 44.5,104.5 R_CHANGE.1 | 18,33 19.5,33 21,34.5 R6.2 | 18,33 16.5,33 15.5,34 R10.2 15,34.5 14.5,35 14.5,35.5 11.3,38.7 11.3,43.64 9.77,45.16 9.77,45.49 U2.2 | 18,33 22,29 24.81,29 27.55,31.74 27.55,32.47 | 35.74,55.04 37,56.3 37,58.5 38.75,60.25 40.25,60.25 43,57.5 U1.8 43.5,57.5 44,57 | 44,57 U1.7 | 30.75,39.25 33,41.5 R1.2 | 30.53,39.03 30.5,39 30.5,35.42 R7.2 27.55,32.47 | 36,35.5 32.25,39.25 30.75,39.25 | 36,35.5 39.25,32.25 40.75,32.25 43,34.5 R5.2 | 36,35.5 R9.2 | 35.74,55.04 U1.3 | 103,24.5 102.5,24 100.5,24 99.5,25 Q2.3 99,25.5 96.5,25.5 65,57 44,57 | 103,24.5 103,25 R_CL1.2 103.02,25.95 100.81,28.16 99.66,28.16 98.66,27.16 96.64,27.16 83,40.8 83,46 82,47 D7.2 81.5,47.5 79.5,49.5 79.5,51.5 86,58 87.5,58 87.75,58.25 | 103,24.5 108.5,19 164.99,19 J3.2 | C3.+ 129,57 124.46,57 C1_BAT2.1 123.23,56.77 122.8,57.2 IC4.5 | 120.5,57 IC4.5 | 86.5,63.5 87,63.5 R2_PINH1.2 | 86.5,63.5 85.5,63.5 R1_PINH1.2 85.5,64 68,81.5 68,98 | 86.5,63.5 86.5,61.76 87.54,60.72 87.54,60.46 88.23,59.77 U3.2 88.23,58.73 87.75,58.25 | IC4.5 120,57 119,57 118,58 112.5,58 111,59.5 92,59.5 90.25,57.75 88.75,57.75 88.25,58.25 87.75,58.25 | 35.74,55.04 34.8,54.1 34.8,52.37 32.25,49.82 32.25,41.31 30.53,39.6 30.53,39.03 | TP16.TP 28.84,30.96 27.55,32.47 | 30.53,39.03 30.75,39.25
32KHZ  (via drill 0.3)
  Top 0.15: 89.5,62.75 89.5,59.75 U3.1 | 89.5,62.75 89.5,63 89,63.5 88.75,63.5 R2_PINH1.1 | v89.25,63 89.5,62.75 | v33.9,60.65 20.23,46.98 18.86,46.98 18.74,46.86 18.74,46.65 U2.9
  Bottom 0.15: v33.9,60.65 81.4,60.65 85.75,65 87.25,65 v89.25,63
DN  (via drill 0.3, 0.35)
  Top 0.15: 164.5,53.5 164.41,53.52 | 164.41,53.52 J2.B7 | v146.5,55 141.75,50.25 D1.1 | J2.A7 165.25,54.55 v165.8,54 165.32,53.52 164.41,53.52
  Bottom 0.15: v146.5,55 164.8,55 v165.8,54
DP  (via drill 0.3)
  Top 0.15: 153.3,54.05 153.62,54.38 | 164,55 164.25,55 J2.B6 | v143,48.25 141.75,48.25 D1.3 | v147.5,48.25 152.62,53.38 153.3,54.05 | 153.3,54.05 J2.A6
  Top 0.152: 153.62,54.38 163.11,54.38 163.73,55 164,55
  Bottom 0.15: v147.5,48.25 v143,48.25
EPD_3V3
  Top 0.3: J1.16 81.5,15.25 82,14.75 81.75,14.5 76.5,14.5 71.5,9.5 L1.2 71.5,9.25 71.25,9 71.25,6.25 C7.1 | 96.5,24.5 96.75,24.25 97.25,24.25 Q2.2 | 96.5,24.5 94,27 88.75,27 EPD_C5.1 | 93,21 93,7.75 97.5,3.25 TP17.TP | 96.5,24.5 93,21 | J1.16 81.41,16.34 81.15,16.6 81.15,18.25 83.9,21 93,21 | J1.16 J1.15
EPD_3V3_C
  Top 0.3: R_CL1.1 101.5,25.5 100.84,26.16 100.31,26.16 | U2.18 21,63.5 21,62.5 21.5,62 60.9,62 96.59,26.31 Q2.1 99.43,26.31 99.59,26.16 100.31,26.16 | 100.31,26.16 100.31,26.31 TP13.TP
EPD_BUSY  (via drill 0.3)
  Top 0.15: v86.5,18.25 86.5,17.75 85,16.25 85,15.5 J1.9 | v98.75,6.5 97.75,5.5 TP9.TP | v10.75,49.75 10.75,63.25 10.5,63.5 U2.26 | v70.2,29.85 70,29.85 v67.4,27.25
  Bottom 0.15: v98.75,6.5 98.75,10 90.5,18.25 v86.5,18.25 74.9,29.85 v70.2,29.85 | v10.75,49.75 15.25,45.25 21.1,45.25 29.6,36.75 38,36.75 44.02,30.73 45.3,30.73 48.78,27.25 v67.4,27.25
EPD_CS  (via drill 0.3)
  Top 0.15: v83.5,16.75 83.5,15.5 J1.12 | v96.5,9.25 96.75,9.5 97.75,9.5 TP10.TP | v37,36.25 37.5,35.75 R9.1 | v34.25,36.25 34,36 33.5,36 D6.2 | U2.11 20.75,46 21,45.75 v21,44.75
  Bottom 0.15: v83.5,16.75 89,16.75 91.12,14.62 | v96.5,9.25 91.12,14.62 | 91.12,14.62 90.38,14.62 90,14.25 59,14.25 v37,36.25 v34.25,36.25 29.5,36.25 v21,44.75
EPD_DC  (via drill 0.3)
  Top 0.15: v84,17.25 84,15.5 J1.11 | v96.5,10 96,9.5 96,8.75 97.5,7.25 TP11.TP | v13.25,44.75 13.25,46 U2.5
  Bottom 0.15: v84,17.25 89.25,17.25 v96.5,10 97,9.5 97,9 96.75,8.75 96.25,8.75 94.5,10.5 47.5,10.5 28.28,29.72 24.64,29.72 22.55,31.81 22.55,35.45 v13.25,44.75
EPD_RST  (via drill 0.3)
  Top 0.15: v85.75,17.75 85.75,17.5 84.5,16.25 84.5,15.5 J1.10 | v96.25,11.75 97.75,11.75 TP12.TP | v17,61.5 17,63.5 U2.21 | v44.25,56.25 59,41.5 v59,39
  Bottom 0.15: v96.25,11.75 90.25,17.75 v85.75,17.75 75.3,28.2 69.2,28.2 59,38.4 v59,39 | v17,61.5 22.25,56.25 v44.25,56.25
FLASH_CS  (via drill 0.3)
  Top 0.15: R5.1 44.5,34.75 43.75,35.5 v41.5,35.5 40.75,35.5 40.75,35.75 D9.2 | U1.1 35.5,57.75 32.75,57.75 26.4,51.4 26,51 22,47 22,46.25 U2.12
  Top 0.152: 26.4,51.4 26.25,51.25 | v25.97,51.03 26,51
  Bottom 0.15: v25.97,51.03 v41.5,35.5
GDR  (via drill 0.3)
  Top 0.15: v88.75,16.25 88.5,16 88.5,15.5 J1.2 | 63.5,20.75 v63.75,20.5 | 63.5,20.75 63,20.75 Q3.1 | 63.5,20.75 64.25,21.5 64.25,24.75 65,25.5 R4.2
  Bottom 0.15: v88.75,16.25 88.25,15.75 79.75,15.75 75,20.5 v63.75,20.5
GND  (via drill 0.3, 0.35)
  Top 0.15: U2.29_5 13.75,53.5 13.75,54.5 U2.29_6 | v116.5,56 117.25,56 117.25,56.25 IC4.2 | 123.38,57.12 123.35,57.15 123.35,57.19 | v121.5,58 121.57,58.07 C1_BAT2.2 | D11.1 26.46,32 v23,32 | C2.2 25,67.95 v25,68 | U2.1 7.96,51.96 10,54 | R2.1 58.14,32.46 58.1,32.5 v57.8,32.2 | EPD_C11.2 71.01,28.49 72,27.5 v72.25,27.75
  Top 0.152: D8.1 16.87,38.13 v16,39 17.4,40.4 19.5,40.4 v19.5,40 | J2.MP3 163.68,48 151,48 v151,47 | C3.- 130.15,61 v134,61 | C10_SUPERCAP.1 85.02,40.98 v84,42
  Bottom 0.15: v121.5,58 118.5,58 v116.5,56 | v23,32 25,30 v42,30 | v25,68 v23,68 21.8,66.8 v21.4,66.8
  Bottom 0.152: v16,39 v13,39 | v19.5,40 20,40.5 20,42 v22,42 | v151,47 150.03,47.97 v150.03,48.97 | v134,61 v137,61 | v84,42 83,42 v80,45
  pour Top: 74.06,10.06 74.08,10.08 92.22,10.08 92.24,10.06 92.26,10.04 92.28,10.02 92.28,0.08 170.12,0.08 170.12,67.12 92.18,67.12 92.16,67.14 92.14,67.16 92.12,67.18 92.12,111.12 68.23,111.12 68.08,110.97 68.08,110.08 68.06,110.06 67.94,109.94 67.92,109.92 20.38,109.92 20.36,109.94 20.34,109.96 20.32,109.98 20.32,111.12 0.08,111.12 0.08,64.58 7.02,64.58 7.04,64.56 7.06,64.54 7.08,64.52 7.08,44.98 7.06,44.96 7.04,44.94 7.02,44.92 0.08,44.92 0.08,0.08 74.02,0.08 74.02,10.02 74.04,10.04
  pour Bottom: 74.06,10.06 74.08,10.08 92.22,10.08 92.24,10.06 92.26,10.04 92.28,10.02 92.28,0.08 170.12,0.08 170.12,67.12 92.18,67.12 92.16,67.14 92.14,67.16 92.12,67.18 92.12,111.12 68.23,111.12 68.08,110.97 68.08,110.08 68.06,110.06 67.94,109.94 67.92,109.92 20.38,109.92 20.36,109.94 20.34,109.96 20.32,109.98 20.32,111.12 0.08,111.12 0.08,64.58 7.02,64.58 7.04,64.56 7.06,64.54 7.08,64.52 7.08,44.98 7.06,44.96 7.04,44.94 7.02,44.92 0.08,44.92 0.08,0.08 74.02,0.08 74.02,10.02 74.04,10.04
GPIO8
  Top 0.15: R1.1 31.5,42 31.5,42.5 29.75,44.25 20.25,44.25 19.5,45 19.5,46 U2.10
I2C_PW
  Top 0.3: R2_PINH.2 31.5,72.5 30.5,72.5 R1_PINH.2 30,72.5 26,72.5 | 24.5,71.5 SENSOR2.8 24.52,71 | 26,72.5 26,71.5 SENSOR2.6 26.12,69.96 28,68.08 | 26,72.5 25.5,73 25.5,74 SENSOR2.2 25.05,74.53 25.05,74.84 24.85,75.04 24.19,75.04 22.99,73.84 22.99,72.53 24.52,71 | U2.17 22,63.6 22,67.75 24.52,70.27 24.52,71 | C1.1 28.23,66.15 28.23,67.92 28.07,68.08 28,68.08 | C2.1 26.44,68.08 28,68.08
INT_RTC  (via drill 0.3)
  Top 0.15: 85,62.75 86.75,61 86.75,59.75 U3.3 | 85,62.75 84.25,63.5 R1_PINH1.1 | v17.1,47.8 17.1,46.4 U2.8 | TP15.TP 86.25,67.94 v86.25,64.5 | v84.5,62.75 85,62.75
  Bottom 0.15: v17.1,47.8 17.1,48.6 23.75,55.25 77,55.25 v84.5,62.75 v86.25,64.5
IO/BOOT  (via drill 0.3)
  Top 0.15: C6.1 27,106 27,108.5 26.5,109 25.75,109 BOOT_BUTTON.3 25.5,109.25 22.25,109.25 BOOT_BUTTON.4 22,109 21.5,109 21,108.5 v21,106.25 21,106 20.75,105.75 R_BOOT.2 | v24.25,69.25 24.25,63.75 U2.15
  Bottom 0.15: v24.25,69.25 21,72.5 v21,106.25
IO/CHANGE  (via drill 0.3)
  Top 0.15: C10.1 52,106 52,108.5 51.5,109 50.75,109 CHANGE_BUTTON.3 50.5,109.25 47.25,109.25 CHANGE_BUTTON.4 47,109 46.5,109 46,108.5 46,107.25 v45,106.25 44.5,105.75 R_CHANGE.2 | v14.5,64.75 14.5,63.75 U2.23
  Bottom 0.15: v14.5,64.75 23.75,64.75 24.25,64.25 24.75,64.25 45,84.5 v45,106.25
MISO  (via drill 0.3)
  Top 0.15: 7.25,69.5 7.5,69.25 7.5,68.25 TP6.TP 7.5,68 9,66.5 9,63.75 U2.27 9.25,63.5 9.25,62.75 v9.75,62.25 | 7.25,69.5 6.5,70.25 R8.1 | v35,55.75 35.5,56.25 U1.2 | J4.P7 5,93.75 4,93.75 v3.75,93.5 | 7.25,69.5 8.15,69.5 D12.2
  Bottom 0.15: v35,55.75 16.25,55.75 v9.75,62.25 9.75,86.5 3.75,92.5 v3.75,93.5
MOSI  (via drill 0.3)
  Top 0.15: v81.75,16.75 82.5,16 82.5,15.5 J1.14 | R7.1 28.5,35 28.25,35 D11.2 26.12,36 26,36 | 26,36 25.25,36 16,45.25 16,45.75 15.75,46 U2.7 15.5,46.25 v15.5,47.25 | J4.P3 5,89.5 6,89.5 v6.25,89.25 | TP7.TP 27.35,37.84 26,36 | U1.5 43.45,53.68 v43.45,52.95
  Bottom 0.15: v81.75,16.75 79.75,16.75 43.5,53 | 43.5,53 43.3,53.2 24.31,53.2 18.11,47 15.75,47 v15.5,47.25 14.9,47.25 9.25,52.9 9.25,86.25 v6.25,89.25 | 43.5,53 v43.45,52.95
N$2  (via drill 0.3)
  Top 0.15: v145.05,38.55 145,38.5 145,37.15 R2-USB1.2 | J2.A5 164.15,52.9 153.32,52.9 v148.71,48.29
  Bottom 0.15: v148.71,48.29 148.71,46.21 145.05,42.55 v145.05,38.55
N$5
  Top 0.15: D7.1 83.97,47.28 R_CAPACITOR.1
N$10
  Top 0.15: R2-USB.1 145,36 145,36.06 145.75,36.81 145.75,39.5 145.5,39.75 145.5,47.77 153.78,56.05 J2.B5
N$20
  Top 0.15: 117.98,55.77 117.95,55.75 117.87,55.75 IC4.3 | 117.98,55.77 118.07,55.87 118.07,56.63 117.95,56.75 117.87,56.75 IC4.1 117.4,57.18 C1_BAT1.1 111.9,57.18 D2.1 | Q1.2 137.75,63.25 137.5,63 137.5,62.91 133.8,59.2 | 117.98,55.77 118,55.75 118.25,56 133,56
  Top 0.152: 133.8,59.2 133.8,56.8 133,56
N$41
  Top 0.15: C4.1 56.5,15 56.5,16 55.75,16.75 55,17.5 D3.2 | 59.25,18 D4.1
  Top 0.152: D4.1 57.07,17.93 57,18 55.75,16.75
N$43
  Top 0.15: U5.1 133.03,50.86 R1_BAT.1
N$44
  Top 0.15: R1_BAT.2 130.06,50.3 CHG_LED.C
N$45
  Top 0.15: R2_BAT.2 135.19,57.4 U5.5
N$48  (via drill 0.3)
  Top 0.15: v76.75,15.5 77.5,15.5 J1.24 | v92.35,17.85 90,15.5 v90,15 | v108,23.25 106.5,24.75 EPD_C12.1
  Bottom 0.15: v76.75,15.5 79.5,15.5 80.25,14.75 89.75,14.75 v90,15 | v92.35,17.85 92.95,18.45 102.8,18.45 107.6,23.25 v108,23.25
N$50
  Top 0.15: J1.22 78.5,15.5 78.5,22.5 74.25,26.75 74.25,27 EPD_C10.1
N$52
  Top 0.15: J1.20 79.5,15.5 79.5,26.5 79.75,26.75 79.75,27 EPD_C8.1
N$53
  Top 0.15: J1.19 80,15.5 80,24.5 82.25,26.75 82.25,27 EPD_C7.1
N$54
  Top 0.15: J1.18 80.5,15.5 80.5,21.75 85.5,26.75 85.5,27 EPD_C6.1
N$65  (via drill 0.3)
  Top 0.15: v87,18.75 87,15.5 J1.5 | v108.85,23.75 109.99,24.89 EPD_C2.1
  Bottom 0.15: v87,18.75 102.71,18.75 107.71,23.75 v108.85,23.75
N$66  (via drill 0.3)
  Top 0.15: v87.5,19.25 87.5,15.5 J1.4 | v113,24.75 113.5,25.25 114,25.25 EPD_C1.1
  Bottom 0.15: v87.5,19.25 93,24.75 v113,24.75
N$77
  Top 0.15: C_DELAY.1 74,101.25 72.54,99.79 IC1.5
PREVGH  (via drill 0.3)
  Top 0.15: J1.21 79,15.5 79,25.25 77.5,26.75 77.5,27 EPD_C9.1 77.25,27 v76.5,26.25 | v73.95,25.4 73.95,25.15 | 63,14 D5.1
  Top 0.152: D5.1 73.95,24.74 v73.95,25.4
  Bottom 0.15: v76.5,26.25 74.8,26.25 v73.95,25.4
PREVGL
  Top 0.15: J1.23 78,15.5 78,22.17 73.17,27 70.5,27 EPD_C11.1 70.25,27 70.25,26.25 63.25,19.25 | 63,18 D4.2
  Top 0.152: 63.25,19.25 63,19 63,18
RESE  (via drill 0.3)
  Top 0.15: v88,16.25 88,15.5 J1.3 | v63.75,21.75 63.5,22 63,22 Q3.2 62.75,21.75 62.5,22 62.5,24.25 61.25,25.5 R3.2
  Bottom 0.15: v88,16.25 79.75,16.25 74.25,21.75 v63.75,21.75
RESE'
  Top 0.15: 61,31 61,27 R3.1 | 61,31 64,31 SJ1.2 | 61,31 R2.2
RESET  (via drill 0.3)
  Top 0.15: 67.75,106 C5.1 66,105.78 | 65.75,109 RESET_BUTTON.3 65.5,109.25 62.25,109.25 RESET_BUTTON.4 62,109.25 61.5,109.25 61,108.75 61,106.75 60,105.75 R_RESET.2 65.74,105.52 66,105.78 | 67.75,101.5 66.75,102.5 66.75,105.03 66,105.78 | 67.75,101.5 69.25,100 IC1.1 | v24,57.25 22,57.25 16,51.25 15,51.25 10.75,47 10.75,46.5 10.5,46.25 U2.3 | 65.96,105.78 66,105.78 | v67.75,101 67.75,101.5
  Bottom 0.15: v67.75,101 v24,57.25
RTC_RST
  Top 0.15: U2.16 23.25,63.5 23.5,63.25 23.5,62.75 23.75,62.5 83.75,62.5 85.5,60.75 85.5,59.75 U3.4
RX
  Top 0.15: U2.24 13.25,63.75 13.25,68.25 14.25,69.25 14.25,70.5 13,71.75 TP2.TP
SCK  (via drill 0.3)
  Top 0.15: TP8.TP 1,100.69 1,99 3.75,96.25 3.75,94.75 3.25,94.25 3.25,91.4 v2.25,90.4 3.38,90.4 3.97,90.98 4.45,90.98 J4.P5 | v82.5,16.75 83,16.25 83,15.5 J1.13 | v44,54.5 43.5,54.5 43.5,55 U1.6 | 14.75,47.25 14.5,47 14.5,46.25 U2.6 14.5,46 14.5,38.44 16.45,36.5 17.43,36.5 17.55,36.38 17.55,35.91 D10.2 19.53,34.21 20.88,35.55 21.74,35.55 22.4,34.9 R6.1 | 14.75,47.25 v14,47.25 | v24,53.5 19.13,48.63 16.13,48.63 14.75,47.25
  Bottom 0.15: v82.5,16.75 82.5,16.85 82.15,17.2 79.8,17.2 44,53 | v44,54.5 44,53 | v24,53.5 43.5,53.5 44,53 | v2.25,90.4 2.25,70 8.25,64 8.25,52.96 12.84,48.36 12.84,48.09 13.1,47.84 13.41,47.84 v14,47.25
SCL  (via drill 0.3)
  Top 0.15: 27.5,74.75 30.5,74.75 31,74.25 31,74 31.75,74 R2_PINH.1 32,74 v47.75,74 | 27.5,74.75 27,74.25 SENSOR2.4 | 27.5,74.75 27.5,75.1 27.05,75.55 24.2,75.55 22.64,73.99 22.64,69.28 18.74,65.38 18.74,64.15 U2.20 | v140.25,55.75 140.25,61 141,61 U4.7 | v90.25,51 89.75,50.5 U3.16 | v161.5,21.5 164.49,21.5 J3.4
  Bottom 0.15: 140.25,52 140.25,42.75 v161.5,21.5 | 140.25,52 v140.25,55.75 | v47.75,74 48.5,74.75 78.25,74.75 92.97,60.03 92.97,57.22 87.75,52 87.75,51.5 88.25,51 v90.25,51 139.25,51 140.25,52
SDA  (via drill 0.3)
  Top 0.15: SENSOR2.3 26.25,74.25 v26.25,73.25 27.25,73.25 28,74 30,74 R1_PINH.1 30.25,73.75 30.75,73.75 31.25,73.25 v46.25,73.25 | v23.5,70.75 23.5,69.75 19.5,65.75 19.5,63.75 U2.19 | v141,59.75 141,60.5 U4.8 | v88.25,51.75 88.25,50.5 U3.15 | J3.3 165.59,20.2 v166.55,20.2
  Bottom 0.15: v23.5,70.75 26,73.25 v26.25,73.25 | v166.55,20.2 166.55,34.2 153.68,47.07 153.68,47.93 151.32,50.28 150.47,50.28 v141,59.75 96.25,59.75 93.25,56.75 | 93.25,56.75 v88.25,51.75 | v46.25,73.25 48.05,75.05 78.45,75.05 93.25,60.25 93.25,56.75
SRC
  Top 0.15: 59.25,13.75 D5.2 | 60.5,15 60.5,21.25 Q3.3 | 59.75,13 63.25,13 66.75,9.5 L1.1
  Top 0.152: C4.2 56.75,13.75 59.25,13.75 | 60.5,15 60.5,14.79 D5.2 59.49,13.26 59.75,13
SS_SD  (via drill 0.3)
  Top 0.15: 16.75,35.5 16.75,35.75 D8.2 16.75,35.5 | 16.75,35.5 16.75,34.5 R10.1 | J4.P2 5.5,88.25 5.7,88.25 v6.65,87.3 | U2.4 12,46.25 12,47 v13.27,48.27 | 16.75,35.5 15.23,35.5 11.77,38.96 11.77,43.7
  Top 0.152: U2.4 11.77,45.67 10.9,44.8 10.9,44.57 11.77,43.7
  Bottom 0.15: v6.65,87.3 6.65,66.1 8.75,64 8.75,52.85 13.27,48.33 v13.27,48.27
TX
  Top 0.15: U2.25 12,63.75 12,69 12.75,69.75 TP1.TP
USB_D+  (via drill 0.3)
  Top 0.15: D1.4 143.87,48.17 143.25,47.55 143.25,39.75 v139.75,36.25 | v63,36.25 62.4,36.25 v60.75,34.6 | U2.14 v25.5,45
  Bottom 0.15: v63,36.25 v139.75,36.25 | v60.75,34.6 40.65,34.6 30.25,45 v25.5,45
USB_D-  (via drill 0.3)
  Top 0.15: v147,55.5 147,53 144.25,50.25 D1.6 | v33.4,57.25 32.8,57.25 23.25,47.7 23.25,46.25 U2.13
  Bottom 0.15: v147,55.5 136,66.5 87.5,66.5 78.65,75.35 45.85,75.35 32,61.5 32,58.65 v33.4,57.25
VBAT
  Top 0.3: U5.3 138.51,54.44 139.66,54.44 145.67,60.46 C2_BAT.1 | C2_BAT.1 146.96,63.92 TP3.TP | U4.3 144.49,61.45 | 144.49,61.45 145.02,61.98 | 145.02,61.98 C2_BAT.1 | U4.2 143.99,60.95 144.49,61.45 | 145.02,61.98 143,64 140,64 Q1.3
VBUS
  Top 0.3: Q1.1 137.88,65.12 137.88,64.75 138.75,63.88 138.75,57 138.88,56.88 138.88,56.5 C1_BAT.1 139,56.38 138.12,56.38 138,56.5 U5.4 137.88,56.5 136.25,54.88 136.12,55 133.25,55 129.25,51 129.12,51.12 128.12,51.12 127.38,50.38 CHG_LED.A | R1_PWRUSB.2 103.12,58.12 103.12,57.5 104.75,55.88 TP14.TP 104.88,56 105.38,55.5 108.38,58.5 D2.2 109.12,58.5 112.75,54.88 116.5,54.88 116.88,54.5 123.12,54.5 127.38,50.25 127.62,50.25 CHG_LED.A | CHG_LED.A 127.75,50.25 127.88,50.25 128.5,49.62 129.72,49.62 129.83,49.74 134.89,49.74 135.25,49.38 135.25,49.12 C4_USB.1 | C5_USB.1 135.38,48 135.38,48.88 C4_USB.1 | 140.03,49.12 135.38,49.12 C4_USB.1 | 140.03,49.12 141.5,49.12 D1.2 | PFMF.050.1.2 142.75,41.79 142.75,45.74 140.73,47.76 140.73,48.42 140.03,49.12
VRTC
  Top 0.3: U3.14 86.97,45 | 86.97,45 86.97,43.66 C10_SUPERCAP.2 | 86.97,45 89.16,42.8 C8.1 | 86.97,45 85.78,45 R_CAPACITOR.2
VUSB
  Top 0.3: 164.25,56.75 J2.A9 | J2.A9 J2.B4 | J2.A9 164.67,56.48 164.99,56.48 166.33,55.13 166.33,53.47 164.99,52.12 164.42,52.12 164.29,52 | J2.B9 164.29,52 | 164.29,52 J2.A4 | PFMF.050.1.1 146.63,44.83 153.81,52 164.29,52